# Altium PCB Copy of corePCB3.PcbDoc (part 2 of 3)
Units mil, origin at the board's own origin, x right, y up, seen from the top; angles counter-clockwise.
Board outline 6000 x 4000 mil, 6 copper layers (Top Layer, Layer 3, Layer 1, Layer 2, Layer 4, Bottom Layer), stack 32.111 mil thick; 90 components, 166 nets, 637 pads, 492 vias.
Unrouted connection lines stored in the file: 227.
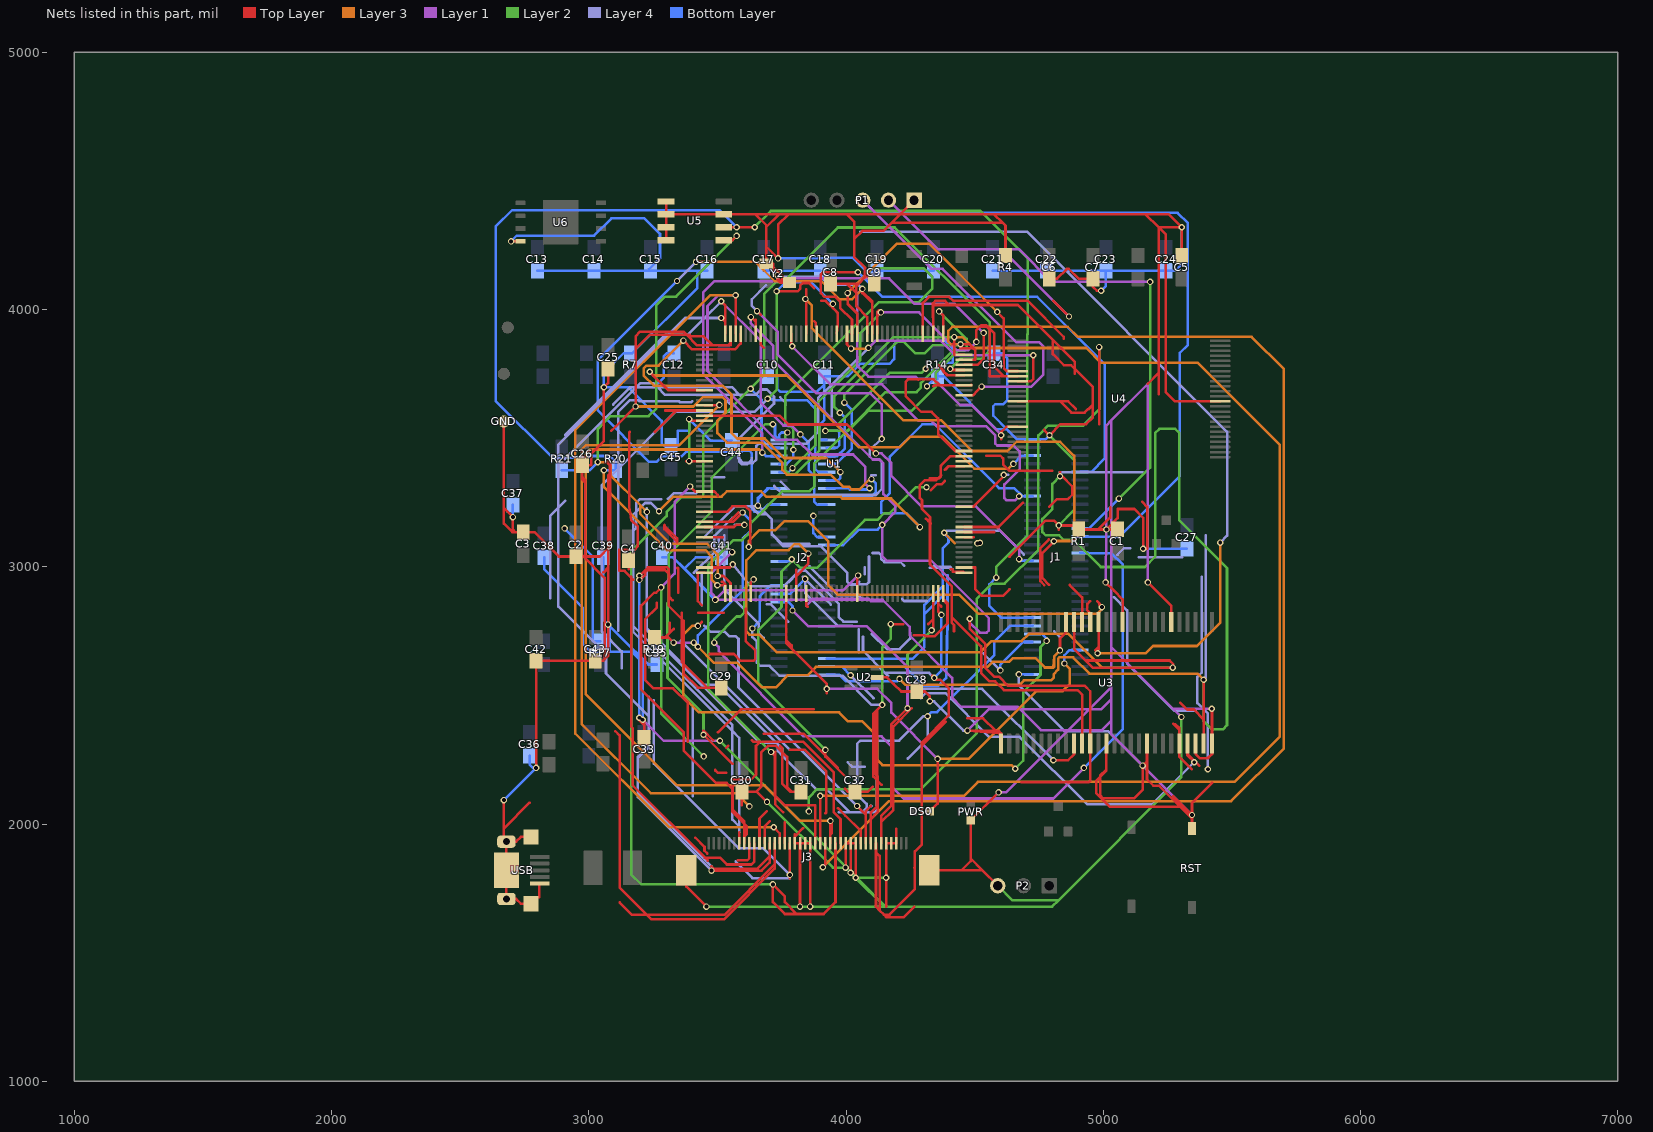
[diagram p6: the nets of this part, all layers, seen from the top]

## Via types
v1: diameter 25, hole 15, Top Layer to Bottom Layer, 492 vias

## Nets (pads, with @x,y where several pads share a name; then routed paths per layer and width w, separated by ;. In a path a pad name is that pad's centre, name@x,y a point inside that pad or via, vN(x,y) a via of type N, cw(c..) or ccw(c..) an arc to the next point about the centre after c; other vN are vias at no path point) (continued)
FMC_D13: J2.58 U1.96 U3.50 | length 2784.2
  Top Layer w10: U1.96@4459.09,3115.35 4496,3115.35 ; 5273,2389 5295.98,2366.02 ; 5279.98,2388.5 5295.98,2372.5 5295.98,2366.02 ; 5344,2213 5295.98,2261.02 U3.50@5295.98,2312.56 5295.98,2366.02
  Layer 3 w10: v1(4382,3132) 4423,3091
  Layer 4 w10: v1(4382,3132) 4383,3132 4391,3140 4599,3140 4691.5,3047.5 ; 5055.5,3047.5 5080,3072 5104,3072 ; 5139,3037 5307,3037 ; 5383,2961 5383,2589 5366,2572 5366,2470 5407,2429 v1(5407,2213)
  Bottom Layer w10: J2.58@3925.04,2643.03 J2.58@3953,2643.03 ; J2.58@3954.03,2642 4259,2642 4305,2688 4305,2816 ; J2.58@3953,2643.03 3954,2642.03 3954,2643.03 J2.58@3953,2643.03 ; 4305,2816 4305,2852 4376,2923 ; 4305,2816 4376,2887 4376,2923 ; 4376,2923 4376,3071.5 ; 4376,3071.5 4376,3072 4398,3094 4398,3112 4382,3128 v1(4382,3132) 4400,3114 4400,3095.5 4376,3071.5
  other v1: 4511,3091
FMC_D14: J2.59 U1.97 U3.51 | length 3286.9
  Top Layer w10: U1.97@4459.09,3135.04 4503,3135.04 4576,3135.04 ; U3.51@5327.48,2312.56 5327.48,2272 ; v1(5353.81,2240.19) 5327.48,2266.52 5327.48,2272 ; 5372.48,2227 5327.48,2272
  Layer 4 w10: v1(4018,2578) 4107,2489 ; 4290,2489 4310,2509 4386,2509 4556,2339 4675,2339 4938,2076 5189.63,2076 v1(5353.81,2240.19) ; 5041.5,2882 5093,2830.5 5093,2624 5277,2440 5360,2440
  Bottom Layer w10: J2.59@3925.04,2611.54 3984.46,2611.54 ; v1(4018,2578) 3984.46,2611.54 ; 4394.5,2966.5 4394.5,2789.5 4389.24,2567.24 4358,2536 4302.54,2536 4227,2611.54 3984.46,2611.54
  other v1: 4521,3093
FMC_D15: J2.60 U1.98 U3.53 | length 6146.8
  Top Layer w10: U1.98@4459.09,3154.72 4536.09,3154.72 4593.72,3154.72 4688,3249 ; 4790.5,3233.5 4820,3263 4862.5,3263 4879.5,3280 4879.5,3312 4839.5,3352 v1(4832,3352) ; 4831,3368 4832,3367 ; 5300,2471 5326,2445 5352.47,2445 5390.47,2407 ; v1(5390,2561) 5390.47,2560.53 5390.47,2407 ; U3.53@5390.47,2312.56 5390.47,2407
  Layer 2 w10: v1(4832,3352) 4802,3322 4802,3224.5 4763.5,3186 4763.5,3135 4776,3122.5 4828,3122.5 4845.5,3105 4885,3105 4991,2999 5162,2999 5202,3039 5202,3520 5218,3536 5280,3536 5296,3520 5296,3180 5481,2995 5481,2384 5465,2368 5422,2368 5390,2400 v1(5390,2561)
  Layer 3 w10: v1(4208,2564) 4230,2542 4676,2542 4692,2558 4797,2558 4807,2568 4807,2582 4825,2600 4825,2643 4830,2648 4883,2648 4946.5,2584.5 5366.5,2584.5 v1(5390,2561)
  Layer 4 w10: 4831,3368 5154,3368 ; 5399,2570 5399,3123
  Bottom Layer w10: J2.60@3925.04,2580.04 3974.39,2580.04 3999.93,2554.5 4198.5,2554.5 v1(4208,2564)
FMC_NBL0: J2.43 U1.169 U3.15 | length 4415.7
  Top Layer w10: v1(3654,3994) 3669.11,3978.89 ; U1.169@3669.11,3905.33 3669.11,3862.89 3680,3852 ; 4970,2676 4982,2688 ; v1(4978,2664) 4978,2676 4982,2680 4982,2688 ; U3.15@4981.02,2785 4981.02,2754 4982,2753.02 4982,2688
  Layer 1 w10: v1(3654,3994) 3735,3913 3735,3824 3885,3674 4096,3674 4139,3631 v1(4139,3497)
  Layer 3 w10: v1(4978,2664) 5166,2664 5194,2692 5364,2692 5455,2783 v1(5455,3094)
  Layer 4 w10: v1(3654,3994) 3634,4014 3634,4040 3689,4095 ; 4055,4303 4703,4303 5482,3524 5482,3121 v1(5455,3094) ; 4092.5,3428.55 4092.5,3456 v1(4139,3497)
  Bottom Layer w10: v1(3873,3197.5) 3873,3130.47 3888,3115.47 J2.43@3925.04,3115.47
FMC_NBL1: J2.44 U1.170 U3.39 | length 3480.7
  Top Layer w10: v1(3630,3970.5) 3649.43,3951.07 ; U1.170@3649.43,3905.33 3649.43,3951.07 ; 3649.43,3961 3649.43,3951.07 ; v1(4481,2798) 4481,2760 4542,2699 4542,2607 4576,2573 4594,2573 4630,2537 4928.53,2537 4949.53,2516 U3.39@4949.53,2312.56 4949.53,2168.53 4944,2163 4681,2163
  Layer 1 w10: v1(3630,3970.5) 3630,3946 3716.57,3859.43 3716.57,3804.49 4104,3417.05 4129.95,3417.05 4145.38,3401.62 4145.38,3282.62 4192,3236 4192,3214 v1(4141,3163) 4141,3040 4157,3024 4331.37,3024 4555,2800.37 4555,2752 4547,2744 4521,2744 4481,2784 v1(4481,2798)
  Bottom Layer w10: J2.44@3925.04,3083.98 3989.3,3083.98 4050.02,3144.69 4122.69,3144.69 v1(4141,3163)
FMC_NCE3: R17.2 U1.152 U4.9 | length 4372.5
  Top Layer w10: U1.152@4003.76,3905.33 4003.76,3864.24 v1(4020,3848) ; U4.9@4667.6,3721.53 4720,3721.53 4728,3729.53 v1(4728,3822)
  Layer 1 w10: v1(4087,3851) 4113.85,3877.85 4369.65,3877.85 4425.5,3822 v1(4728,3822)
  Layer 3 w10: v1(4020,3848) 4084,3848 v1(4087,3851)
  Layer 4 w10: 2906,3418.37 3185.63,3698 ; 3094.5,3630.5 3162,3698 3185.63,3698 ; 3585.13,3450.15 3585.13,3418.37 ; 3595,3659 3586,3668 ; 3633.5,3422.5 3633.5,3416 3621,3403.5 ; 3744,3659 3763.06,3639.94 3763.06,3628.08 ; 3945,3584 3945,3709 ; v1(4087,3851) 3945,3709 ; 3185.63,3698 3267,3698 ; 3185.63,3698 3201.13,3713.5 3251.5,3713.5 3267,3698 ; 3267,3698 3297,3668 3586,3668 ; 3267,3698 3556,3698 3586,3668 ; 3585.13,3418.37 3600,3403.5 3621,3403.5 ; 3585.13,3418.37 3582,3421.5 3582,3496 3720,3634 3720,3662 3693,3689 3669,3689 3648,3668 3586,3668 ; 3585.13,3418.37 3585.13,3408 3594.63,3398.5 3616,3398.5 3621,3403.5 ; 3621,3403.5 3637.5,3403.5 3651.5,3417.5 3651.5,3469.98 3659.96,3478.44 3846.44,3478.44 3891.74,3523.74 3891.74,3655.74 3945,3709
  Bottom Layer w10: v1(2906,3149) 3016,3039 3016,2710 R17.2@3045.06,2710
FMC_NE1: J1.35 U1.151 | length 2117.7
  Top Layer w10: U1.151@4023.44,3905.33 4023.44,3960.49 3977.22,4006.71 3977.22,4032 3959.72,4049.5 3934.43,4049.5 3916.52,4049.5 3902.46,4063.55 ; v1(4046,4145) 3911.18,4145 3902.46,4136.29 ; 3902.46,4063.55 3902.18,4063.84 3902.18,4136 3902.46,4136.29 ; 3902.46,4063.55 3902.46,4136.29
  Bottom Layer w10: v1(4046,4145) 4141.5,4049.5 4743.5,4049.5 5005.25,3787.75 5005.25,3420.27 4954,3369.02 J1.35@4910,3369.02
FMC_NOE: J2.26 U1.146 U4.8 | length 2015.2
  Top Layer w10: U1.146@4121.87,3905.33 4121.87,3975 ; v1@4127.87,3997 4121.87,3991 4121.87,3975 ; v1(4135.87,3989) 4121.87,3975 ; v1(4507,3874) 4507,3890 4507,3920 4520,3933 ; U4.8@4667.6,3741.22 4611.78,3741.22 ; 4520,3933 4526,3939 4544,3939 4577,3906 4577,3776 4611.78,3741.22 ; 4520,3933 4546,3933 4559,3920 4559,3741.22 4611.78,3741.22
  Layer 1 w10: v1(4135.87,3989) 4284,3989 4432,3841 4474,3841 v1(4507,3874)
  Layer 2 w10: v1(3792,3383.44) 3880.5,3471.94 3880.5,3628.42 4054.29,3802.22 4054.29,3907.42 v1(4135.87,3989)
  Bottom Layer w10: J2.26@3740,3367.44 3776,3367.44 v1(3792,3383.44)
FMC_NWAIT: J2.27 U1.150 U4.7 | length 2785.1
  Top Layer w10: v1(4006,4064) 4006,4023.13 ; U1.150@4043.13,3905.33 4043.13,3985 ; v1(4588,3991) 4613,3966 4613,3771.9 4624,3760.9 U4.7@4667.6,3760.9 ; 4006,4023.13 4006,4022.13 4043.13,3985 ; 4006,4023.13 4043.13,3986 4043.13,3985
  Layer 2 w10: v1(3795.5,3454.94) 3795.5,3536 3786,3545.5 3776,3545.5 3763.5,3558 3763.5,3664 4128,4028.5 4283.5,4028.5 4335,4080 4335,4128 4303,4160 4102,4160 v1(4006,4064)
  Layer 3 w10: v1(4006,4064) 4198,4256 4323,4256 v1(4588,3991)
  Bottom Layer w10: J2.27@3740,3398.94 3768.5,3398.94 3795.5,3425.94 v1(3795.5,3454.94)
FMC_NWE: J2.22 U1.147 U4.18 | length 4155.9
  Top Layer w10: v1(4064,4080) v1@4064,4069 ; U1.147@4102.19,3905.33 4102.19,4025.81 ; 4603,3495 v1(4603,3511) 4603,3523.37 4624,3544.37 U4.18@4667.6,3544.37 ; v1@4064,4069 4064,4064 4102.19,4025.81 ; v1@4064,4069 4102.19,4030.81 4102.19,4025.81
  Layer 1 w10: v1(4064,4080) 4043.5,4059.5 4043.5,3783.09 4087.09,3739.5 4270.5,3739.5 4279.5,3730.5 4341.58,3730.5 4443.08,3629 4488.5,3629 4603,3514.5 v1(4603,3511)
  Layer 3 w10: v1(3417,4185) 3648,4185 3723,4110 3904,4110 3974,4040 4024,4040 v1(4064,4080)
  Layer 4 w10: v1(3343,4111) v1(3417,4185) ; 3760,4128 3900,4128 3932,4096 4048,4096 v1(4064,4080)
  Bottom Layer w10: v1(3343,4111) 3035,3803 3035,3608 3235,3408 3263,3408 3284,3429 3361,3429 3380,3448 3594,3448 3597,3451 3624,3451 3634,3441 3634,3224 3644,3214 3669,3214 3696.46,3241.46 J2.22@3740,3241.46
FMC_SDCKE0: U1.35 U3.37 | length 1633.9
  Top Layer w10: U1.35@3450,3154.72 3549.28,3154.72 3564.72,3154.72 3573,3163 v1(3605,3163) ; v1(4806,2248) 4864,2248 4886.53,2270.53 U3.37@4886.53,2312.56
  Layer 4 w10: 3527,3122 3527,2912 3660,2779 3660,2743 3680,2723 ; 3568,3163 v1(3605,3163) ; 3691.95,2854.43 3707.12,2854.43 3774.55,2787 ; 4049.27,2667.73 4049.27,2757.23 ; 4279.85,2517 4287.85,2525 4529,2525 v1(4806,2248)
FMC_SDCLK: U1.112 U3.38 | length 1823.9
  Top Layer w10: 4310.51,3186.99 4320,3177.5 4320.28,3177.5 4326.5,3171.28 ; 4326.51,3344 4357.7,3344 ; 4329.78,3168 4326.5,3171.28 ; 4369.38,3355.67 4368.54,3354.84 ; 4419.87,2749.8 4419.87,2773.3 4410.5,2782.67 4410.5,2804.44 ; U1.112@4459.09,3430.32 4406.86,3430.32 4369.38,3392.83 4368.54,3392 4368.54,3354.84 ; U3.38@4918.03,2312.56 4918.03,2502.97 4905,2516 4900.5,2520.5 4613.5,2520.5 4579.81,2554.19 4557.66,2554.19 4524.99,2586.85 4524.99,2689.95 4410.5,2804.44 ; 4326.5,3171.28 4326.5,3193.5 4295.5,3224.5 4295.5,3259.08 4287.19,3267.39 4287.19,3317.69 4306.52,3337.02 4350.72,3337.02 4357.7,3344 ; 4326.5,3171.28 4326.5,3009 4329.78,3005.72 4410.5,2925 4410.5,2804.44 ; 4357.7,3344 4368.54,3354.84 ; 4357.7,3344 4362.37,3344 4368.54,3350.17 4368.54,3354.84
FMC_SDNCAS: U1.160 U3.17 | length 2528.9
  Top Layer w10: v1(3842,4041) v1@3846.28,4036.72 ; U1.160@3846.28,3905.33 v1@3846.28,4036.72 ; 3846.28,4079 v1@3846.28,4036.72 ; 4770.75,2928.75 4755.5,2944 4755.5,3072.5 4789,3106 ; 4789.5,2929.5 4763,2956 4763,3054 v1(4808,3099) ; 4869.5,2929.5 4918.03,2880.97 4918.03,2831.97 U3.17@4918.03,2785
  Layer 3 w10: v1(3842,4041) 3867,4016 3867,3926.5 4224,3569.5 4370.5,3569.5 4490,3450 4627,3450 4663,3486 4832,3486 4887,3431 4887,3104 4883.03,3100.03 4809.03,3100.03 v1(4808,3099)
FMC_SDNE0: R19.2 U1.34 U3.19 | length 2880.2
  Top Layer w10: R19.2@3255.06,2725 3296,2725 ; 3314,2783 3314,2743 3296,2725 ; v1(3330,2705) 3310,2725 3297,2725 ; 3330,2758 3297,2725 ; U1.34@3450,3174.41 3545.41,3174.41 ; 3582,3211 3545.41,3174.41 ; v1(3598,3211) 3561.41,3174.41 3545.41,3174.41 ; v1(4832,2674.92) 4832,2720.96 4855.04,2744 U3.19@4855.04,2785 ; 3296,2725 3297,2725
  Layer 1 w10: v1(3330,2705) v1(3408,2705)
  Layer 3 w10: v1(3408,2705) v1(3424,2689) 3486.5,2626.5 3578,2626.5 3673,2531.5 3728,2531.5 3775,2578.5 3851.5,2578.5 3883.5,2610.5 4550.5,2610.5 4571.5,2631.5 4635,2631.5 4648.5,2645 4736.4,2645 4772.9,2608.5 4806.5,2608.5 ; v1(4832,2674.92) 4809,2651.92 ; 4806.5,2608.5 4809,2651.92 ; 4806.5,2608.5 4809,2611 4809,2651.92
  Bottom Layer w10: v1(3424,2689) 3424,2733.5 3598.5,2908 3598.5,3109.5 3628.5,3139.5 3628.5,3180.5 v1(3598,3211)
FMC_SDNRAS: U1.59 U3.18 | length 3399.7
  Top Layer w10: U1.59@3806.91,2896.24 3806.91,2964.95 ; 3806.91,2988.91 3806.91,2964.95 ; v1@3854,3052 v1(3854,3051) 3854,3036 3854,3012.04 3806.91,2964.95 ; U3.18@4886.53,2785 4886.53,2680.47 4931.5,2635.5 ; v1(5270,2608) 4959,2608 4931.5,2635.5 ; 5273,2621 5258.5,2635.5 4931.5,2635.5
  Layer 3 w10: v1(3854,3051) 3817,3088 3800,3088 3776.5,3064.5 3651.59,3064.5 3612.41,3025.32 3612.41,2748.09 3624,2736.5 3662.5,2736.5 3731.5,2667.5 4521.75,2667.5 4565.25,2711 4682.59,2711 4710.55,2738.96 4864.54,2738.96 4995.5,2608 v1(5270,2608)
FMC_SDNWE: U1.32 U3.16 | length 2139.9
  Top Layer w10: U1.32@3450,3213.78 3537.78,3213.78 3558.5,3234.5 3595,3234.5 3610,3234.5 3628.5,3216 v1@3628.5,3084 ; 4949,2866.5 4938.5,2856 4938.5,2830.4 4949.53,2819.37 U3.16@4949.53,2785 ; 4976,2866.5 4985.5,2857 4985.5,2852.5 v1(4995,2843)
  Layer 3 w10: v1(3622,3077.5) 3622,3101 3662.5,3141.5 3724.5,3141.5 3759.38,3176.38 3853.62,3176.38 3930.5,3099.5 3930.5,2929 3968,2891.5 4440,2891.5 4514.5,2817 4976,2817 4995,2836 v1(4995,2843)
GBC_KEY: J1.15 U1.13 | length 1560.6
  Top Layer w10: U1.13@3450,3587.8 3687.5,3587.8 3741.2,3587.8 3776,3553 4004,3553 v1(4116,3441)
  Layer 1 w10: v1(4116,3441) 4138,3441 4176,3403 4176,3352 4293,3235 4505,3235 4673,3067 v1(4673,3030)
  Bottom Layer w10: v1(4673,3030) 4680.44,3022.56 J1.15@4724.96,3022.56
GBC_LED: J1.45 U1.50 | length 3657.2
  Top Layer w10: 3469.5,2661 3564,2661 3590.56,2634.44 3640.51,2634.44 3648,2641.93 3648,2673.93 3609.93,2712 3609.93,2837.17 ; U1.50@3629.74,2896.24 3629.74,2939.74 v1(3641,2951)
  Layer 1 w10: v1(3488,2705) 3504.67,2688.33 3504.67,2672 3835.67,2341 4138.46,2341 4175.46,2304 4175.46,2147.54 4224,2099 4806,2099 v1(4925,2218)
  Layer 2 w10: v1(3488,2705) 3488,2719.77 3575,2806.77 3589.77,2806.77 3605,2822 3605,2915 v1(3641,2951)
  Bottom Layer w10: J1.45@4910,3054.06 4940.59,3054.06 4941.38,3053.27 5030.73,3053.27 5076,3008 5076,2369 v1(4925,2218)
GND: C1.2 C2.1 C3.2 C4.1 C5.2 C6.1 C7.1 C8.1 C9.1 C10.1 C11.1 C12.2 C13.1 C14.1 C15.1 C16.1 C17.1 C18.1 C19.1 C20.1 C21.1 C22.1 C23.1 C24.1 C25.1 C26.1 C27.1 C28.1 C29.1 C30.1 C31.1 C32.1 C33.2 C34.2 C35.1 C36.1 C37.1 C38.1 C39.1 C40.1 C41.1 C42.1 C43.1 C44.2 C45.2 GND.1 J1.1 J1.30 J2.31 J3.3 J3.4 J3.5 J3.11 J3.12 J3.13 J3.20 J3.21 J3.22 J3.23 J3.29 J3.A J3.B P1.1 P2.3 PWR.2 R1.2 R4.2 R7.2 R14.1 RST.2 U1.14 U1.22 U1.37 U1.61 U1.71 U1.90 U1.102 U1.113 U1.126 U1.135 U1.148 U1.158 U2.2 U3.6 U3.12 U3.28 U3.41 U3.46 U3.52 U3.54 U4.13 U4.36 U5.1 U5.2 U5.3 U5.4 U5.7 U6.4 USB.5 USB.6 USB.7 USB.8 USB.9 Y2.2 Y2.4 | length 49889.1
  Top Layer w10: v1(2670,2092.94) 2670,1983 ; GND.1@2670,3565 2670,3228 ; USB.7@2679.65,1708.78 USB.7@2680,1708.78 ; v1(2698,4265) U6.4@2735,4265 ; 2770.06,2083.06 2670,1983 ; USB.9@2775,1950 2735.78,1950 2717,1931.22 USB.6@2680,1931.22 ; v1(2795.06,2218) C42.1@2795.06,2635 C43.1@3025.06,2635 3056,2635 3062,2641 ; USB.5@2809,1768.82 2807,1768.82 2807,1716 2775,1716 USB.8@2775,1690 2735.78,1690 2717,1708.78 USB.7@2680,1708.78 ; 3056.38,2978 3075,2996.62 ; 3059,2978 3075,2994 ; C25.1@3075,3770 3075,3723 3075,3714 v1(3059,3698) 3059,3489 3009,3439 3009,3395 C26.1@2975.06,3395 2975.06,3349.94 ; 3155.06,2990.94 C4.1@3155.06,3025 ; v1@3189,2410 3201.5,2397.5 3215,2384 ; v1(3197,2413) 3215,2395 3215,2384 ; v1@3197,2946 3218.84,2967.84 3218.84,2977 3229.34,2987.5 3296,2987.5 3311,2972.5 ; v1(3197,2965) 3229.75,2997.75 3305.25,2997.75 3311,2992 3311,2972.5 ; C33.2@3215,2335 3215,2384 ; U5.4@3300.59,4270 U5.3@3300.59,4320 U5.2@3300.59,4370 ; U5.1@3300.59,4420 U5.2@3300.59,4370 ; 3325.42,2869.59 3313,2882.02 3313,2970.5 3311,2972.5 ; 3361.5,2820.29 3361.5,2797.3 ; v1@3378.63,3410.63 v1(3390,3410.63) U1.22@3450,3410.63 ; J3.B@3379.35,1820.57 3379.35,1757 ; v1(3390,3574) 3395.89,3568.11 U1.14@3450,3568.11 ; U1.37@3450,3115.35 3498.65,3115.35 3520.14,3115.35 ; v1(3457,1679) 3379.35,1756.65 3379.35,1757 ; v1@3457.35,1679 3379.35,1757 ; 3502,2356 3591.5,2445.5 3874.57,2445.5 ; C29.1@3515,2530 3460.63,2530 ; 3534,2296 3541.5,2303.5 ; 3595.06,2072.4 C30.1@3595.06,2125 ; J3.29@3683.46,1925 3683.46,1984 3683.46,1990.44 3704,2010.98 ; v1(3693,2086) 3652.5,2126.5 ; v1(3733,4134) v1@3733,4124 ; 3744,2303.5 3752,2295.5 3752,2279.5 ; Y2.2@3780.55,4105 3752,4105 ; 3801.57,1960 3801.57,1952 ; v1(3821.26,1679) J3.22@3821.26,1925 ; C31.1@3825.06,2125 3790,2125 ; 3833.57,1984 3801.57,1952 ; U1.61@3846.28,2896.24 3846.28,2848.72 3851,2844 ; v1(3860.63,1679) J3.20@3860.63,1925 J3.21@3840.94,1925 J3.22@3821.26,1925 ; 3876,3955 3882,3949 3882,3936.65 3885.65,3933 U1.158@3885.65,3905.33 ; C8.1@3940.06,4100 4004,4100 ; 3995.57,2137.43 4008,2125 C32.1@4035.06,2125 4084,2125 4104.5,2145.5 ; v1(3998,1830) v1@3998.43,1830.43 ; v1@3998.43,1828.57 v1(3998.43,1830.2) v1@3998.43,1830.43 ; v1@4018.11,1808.89 v1(4018.11,1810.52) J3.12@4018.11,1925 ; v1@4037.8,1789.2 v1(4037.8,1791) J3.11@4037.8,1925 J3.12@4018.11,1925 ; U1.71@4043.13,2896.24 4043.13,2962.13 v1(4047,2966) ; U1.148@4082.5,3905.33 4082.5,3970.86 4040,4013.36 4040,4064 ; C9.1@4110.06,4100 4110.06,4103.5 4080.65,4132.91 ; U2.2@4120,2570 4160,2570 4185,2545 4215,2515 C28.1@4275,2515 4307,2515 4326,2496 v1(4326,2477) ; 4155.91,1679 v1(4155.91,1791) J3.5@4155.91,1925 J3.4@4175.59,1925 J3.3@4195.28,1925 4195.28,1981.23 ; P1.1@4265,4425 4210,4370 ; 4280.5,3728 4281,3728.5 ; U1.135@4338.41,3905.33 4338.41,3970.5 ; 4340.09,3702 4344,3705.91 4362.97,3705.91 ; U1.90@4459.09,2997.24 4503,2997.24 4503,2912 4528,2887 4610.5,2887 4635.5,2912 ; U1.102@4459.09,3233.46 4496,3233.46 4613,3350.46 v1(4613,3357) ; U1.113@4459.09,3450 4424,3450 4358.5,3515.5 4358.5,3576.5 4332.5,3602.5 4292.5,3602.5 4232.5,3662.5 4232.5,3720 4241,3728.5 4281,3728.5 ; 4472,2411 4533.13,2411 4581.13,2363 ; U1.126@4487,3708 4487,3705.91 U1.126@4459.09,3705.91 4362.97,3705.91 ; P2.3@4590,1760 4529,1821 ; v1(4593,2123) PWR.2@4485,2015 4485,1865 ; U3.28@4603.07,2312.56 U3.28@4603.07,2345.16 ; R4.2@4620.06,4210 4620.06,4325.94 4608,4338 ; 4635.5,3039.05 4775.95,3179.5 4808.5,3179.5 v1(4827,3161) ; U4.13@4667.6,3642.79 4720,3642.79 ; 4736.79,3642.79 4720,3642.79 ; 4770,3532 v1(4791,3511) 4834.17,3554.17 4933.17,3554.17 4960,3581 4960,3629 ; C6.1@4790.06,4120 4821,4120 4859,4158 4866,4158 4904,4120 C7.1@4960.06,4120 4960.06,4088 4975.06,4073 v1(4992,4073) ; 4827,3145 v1(4827,3161) ; 4888.87,3750.13 4888.87,3769.9 ; 4893.86,3613 4864.06,3642.79 4833.03,3642.79 ; 4944,3613 4960,3629 ; v1(5009.45,2939) 5041.45,2907 5075.51,2872.94 U3.12@5075.51,2785 ; U3.41@5012.52,2312.56 5012.52,2212.52 ; 5026.63,3232 5026.63,3191.63 4980,3145 ; C1.2@5055.06,3145 v1(5012,3145) ; 5152,3252 5171,3233 5171,3070 ; v1(5155,3070) 5155,3190.5 5120.82,3224.68 5056,3224.68 5056,3189 v1(5012,3145) ; U3.46@5170,2312.56 5170,2244 ; v1(5173.49,2939) 5205.49,2907 5264.49,2848 U3.6@5264.49,2785 ; 5173.49,3711.49 5215,3753 ; 5215,3670 5215,3753 ; 5273,2107 5313.5,2066.5 ; C5.2@5305.06,4210 v1@5305.06,4320 ; RST.2@5345,1982.09 5345,2021 ; U3.52@5358.98,2312.56 5358.98,2272 5374.98,2256 5405.97,2256 ; 5424,2161 5345,2082 v1(5345,2035) ; 5424,2270.97 5423.48,2271.48 ; U4.36@5455,3642.79 5279.41,3642.79 5242.21,3680 5242.21,4292.79 5215,4320 ; 2670,1983 2670,1931.22 USB.6@2679.65,1931.22 USB.6@2680,1931.22 ; 2670,3228 2670,3168 2703,3135 2714,3135 ; 2670,3228 v1(2705,3193) 2705,3144 2714,3135 ; USB.7@2680,1708.78 USB.9@2680,1820 USB.6@2680,1931.22 ; 2714,3135 C3.2@2745.06,3135 2789,3135 2884,3040 C2.1@2950.06,3040 2979,3040 ; 2975.06,3349.94 2975.06,3337.94 2987,3326 ; 2975.06,3349.94 2987,3338 2987,3326 ; 2979,3040 3062,2957 3062,2641 ; 2979,3040 3043,3040 3075,3072 ; 2979,3040 2987,3048 2987,3326 ; 3062,2641 3075,2654 v1(3075,2775) 3075,2994 ; 3075,2994 3075,2996.62 ; 3075,2996.62 3075,3072 ; 3075,3072 3082.65,3079.65 3082.65,3354.78 ; 3075,3072 3075,3347.13 ; 3075,3347.13 3075,3354.78 3082.65,3362.43 ; 3075,3347.13 3082.65,3354.78 ; 3075,3401.78 3075,3400.65 3082.65,3393 ; 3075,3401.78 3075,3409.43 3082.65,3401.78 3082.65,3394.13 ; 3075,3401.78 3082.65,3394.13 ; 3082.65,3354.78 3082.65,3362.43 ; 3082.65,3362.43 3082.65,3393 ; 3082.65,3393 3082.65,3394.13 ; U5.2@3300.59,4370 U5.7@3525,4370 3565,4370 3648,4370 ; 3311,2972.5 3311,2847.8 3361.5,2797.3 ; 3361.5,2797.3 3361.5,2629.13 3370,2620.63 ; 3361.5,2797.3 3370,2788.8 3370,2620.63 ; 3370,2620.63 3370,2584 3424,2530 3460.63,2530 ; 3370,2620.63 3460.63,2530 ; C30.1@3595.06,2125 3652.5,2126.5 ; C30.1@3595.06,2125 3651,2125 3652.5,2126.5 ; 3648,4370 3740,4370 ; 3648,4370 3690,4328 3690,4320 ; 3652.5,2126.5 3670,2144 3670,2277.5 3696,2303.5 3728,2303.5 3752,2279.5 ; 3690,4245 3690,4320 ; 3690,4245 Y2.4@3690,4177.83 3717.17,4177.83 3717.17,4165.83 ; 3690,4245 v1(3736,4199) 3736,4330 3776,4370 ; 3690,4320 3740,4370 ; 3717.17,4165.83 3717.17,4139.83 v1@3733,4124 ; 3717.17,4165.83 3733,4150 3752,4131 3752,4105 ; v1@3733,4124 3752,4105 ; v1@3733,4124 3733,4116 3744,4105 3752,4105 ; 3740,4370 3776,4370 ; 3752,2279.5 3752,2157.79 3784.79,2125 3790,2125 ; 3752,2279.5 3771,2260.5 3771,2144 3790,2125 ; 3776,4370 4004,4370 ; 3801.57,1952 J3.23@3801.57,1925 J3.22@3821.26,1925 ; v1@3998.43,1830.43 J3.13@3998.43,1925 J3.12@4018.11,1925 ; 4004,4100 4047.74,4100 ; 4004,4100 4040,4064 ; 4004,4370 4032,4342 4032,4274 ; 4004,4370 4210,4370 ; 4032,4274 4064,4306 4146,4306 4178,4338 ; 4032,4274 4032,4205 4074,4163 4074,4139.56 ; 4040,4064 4040,4092.26 4047.74,4100 ; 4047.74,4100 4074,4126.26 ; 4074,4126.26 4074,4139.56 ; 4074,4126.26 4080.65,4132.91 ; 4074,4139.56 4080.65,4132.91 ; 4178,4338 4210,4370 ; 4178,4338 4608,4338 ; 4210,4370 4576,4370 ; 4281,3728.5 4281.31,3728.81 4340.06,3728.81 4340.38,3728.5 ; 4281,3728.5 4340.38,3728.5 ; 4338.41,3970.5 4338.41,4016 4339.91,4017.5 4401.28,4017.5 ; 4338.41,3970.5 4338.28,3970.63 4338.28,4024 4347.78,4033.5 4385.28,4033.5 4401.28,4017.5 ; 4340.38,3728.5 4362.97,3705.91 ; 4401.28,4017.5 4668.48,4017.5 4804.03,3881.94 ; 4450,1821 4485,1856 4485,1865 ; 4450,1821 4449.57,1820.57 J3.A@4323.23,1820.57 4323.23,1821 4450,1821 ; 4450,1821 4529,1821 ; 4485,1865 4529,1821 ; 4576,4370 4608,4338 ; 4576,4370 5165,4370 ; 4581.13,2363 4587.04,2357.1 4591.13,2357.1 4595.6,2352.63 ; 4581.13,2363 4592.07,2363 4603.07,2352 ; 4581.13,2363 v1(4472,2363) 4595.6,2352.63 ; 4595.6,2352.63 4603.07,2352 ; 4595.6,2352.63 U3.28@4603.07,2345.16 ; U3.28@4603.07,2345.16 4603.07,2352 ; 4720,3642.79 4793.5,3642.79 4833.03,3642.79 ; 4804.03,3881.94 4888.87,3797.11 4888.87,3769.9 ; 4804.03,3881.94 4804.03,3826.51 4847.16,3783.38 4875.39,3783.38 4888.87,3769.9 ; v1(4827,3161) 4827.5,3160.5 4905.06,3160.5 R1.2@4905.06,3145 4980,3145 ; 4833.03,3642.79 4876.65,3599.17 4928,3599.17 4960,3631.17 ; 4888.87,3769.9 4960,3698.77 ; 4960,3629 4960,3631.17 ; 4960,3631.17 4960,3698.77 ; 4960,3631.17 4960,3679 4960,3698.77 ; 4980,3145 v1(5012,3145) ; 4988,2183 5012.52,2207.52 5012.52,2212.52 ; 4988,2183 4972.5,2167.5 4972.5,2120.5 5026.5,2066.5 5299.5,2066.5 ; 4988,2183 4988,2188 5012.52,2212.52 ; 4988,2183 4988,2112 5000,2100 5120,2100 5153,2133 v1(5153,2227) 5170,2244 ; 5165,4370 5215,4320 ; 5165,4370 5255.06,4370 v1@5305.06,4320 ; 5170,2244 5170,2173.69 5194.96,2148.73 5217.27,2148.73 5299.5,2066.5 ; 5215,3753 5215,4320 ; 5215,4320 v1(5305,4320) v1@5305.06,4320 ; 5299.5,2066.5 5306.5,2059.5 ; 5299.5,2066.5 5313.5,2066.5 ; 5306.5,2059.5 5345,2021 ; 5306.5,2059.5 5313.5,2066.5 ; 5313.5,2066.5 v1(5345,2035) ; 5345,2021 v1(5345,2035) ; 5405.97,2256 5408,2256 5423.48,2271.48 ; 5405.97,2256 5422.47,2272.5 ; 5422.47,2272.5 5423.48,2271.48 ; 5422.47,2272.5 5421.97,2273 U3.54@5421.97,2312.56 v1(5421.97,2448) 5424,2445.97 5424,2272 5423.48,2271.48
  Layer 1 w10: v1(3209.5,2405.5) 3291.5,2323.5 v1(3510,2323.5) ; v1(3491,2871) v1@3497,2877 ; v1(3493.5,2871.5) 3497,2871.5 3868,2871.5 ; v1(3557,3057) 3476.5,2976.5 3476.5,2897.5 v1@3497,2877 ; 3846.28,2848.72 3846.28,2849.78 3868,2871.5 ; v1(4047,2966) 3989,2908 3528,2908 v1@3497,2877 ; v1(4472,2363) 4554.5,2445.5 4677.5,2445.5 ; v1(4593,2123) 4622.54,2123 4864.54,2365 ; v1(5009.45,2939) v1(5012,3145) 5012,3550 5031,3569 ; v1(5173.49,2939) 5173.49,3711.49 5031,3569 ; v1(5304,2416) 5272,2448 ; v1(5345,2035) v1(5153,2227) 5031,2349 5031,2400 ; v1(5421.97,2448) 5272,2448 ; 3868,2871.5 3872.54,2876.04 4087.31,2876.04 4091.85,2871.5 ; 3868,2871.5 4091.85,2871.5 ; 4091.85,2871.5 4096.65,2866.7 4146.8,2866.7 ; 4091.85,2871.5 4142,2871.5 4146.8,2866.7 ; 4146.8,2866.7 4247.77,2765.73 4247.77,2733.05 4412.5,2568.32 4412.5,2491 4448,2455.5 4667.5,2455.5 4677.5,2445.5 ; 4677.5,2445.5 4758,2365 4864.54,2365 ; 4677.5,2445.5 4945.04,2445.5 ; 4864.54,2365 4945.04,2445.5 ; 4864.54,2365 4996,2365 5031,2400 ; 4945.04,2445.5 5031,2531.46 ; 4945.04,2445.5 4992,2445.5 5031,2484.5 ; 5031,2400 5031,2484.5 ; 5031,2484.5 5031,2531.46 ; 5031,2531.46 5031,2689 ; 5031,2689 5031,3569 ; 5031,2689 5272,2448
  Layer 2 w10: v1(3390,3410.63) v1(3390,3574) ; v1(3457,1679) v1(3821.26,1679) v1(3860.63,1679) 4149.63,1679 ; v1(3510,2323.5) 4000.75,1832.75 4000.86,1832.64 4020.55,1812.95 4040.15,1793.35 v1@4042.5,1791 ; v1(3693,2086) 3949,1830 v1(3998,1830) ; v1(3998.43,1830.2) v1(4018.11,1810.52) 4037.71,1790.92 4149.63,1679 ; v1(4037.8,1791) v1@4042.5,1791 ; v1(4155.91,1791) v1@4042.5,1791 ; P2.3@4590,1760 4646.53,1703.47 4825.47,1703.47 ; v1(4791,3511) 4886.5,3415.5 4886.5,3220.5 v1(4827,3161) ; v1(5304,2416) 5304,2182 4825.47,1703.47 ; v1@4042.5,1791 4154.5,1679 ; 4149.63,1679 4154.5,1679 ; 4154.5,1679 4801,1679 4825.47,1703.47
  Layer 4 w10: v1(4326,2477) 4342,2477 4456,2363 v1(4472,2363) ; v1(4613,3357) 4631,3357 ; v1(4672,2581.61) 4672,2538 4849,2361 5019,2361 v1(5153,2227)
  Bottom Layer w10: v1(2670,2092.94) v1(2795.06,2218) 2784,2218 2770.06,2231.94 C36.1@2770.06,2265 ; v1(2698,4265) 2720,4287 3020.59,4287 3088.09,4354.5 3216.5,4354.5 3277,4294 3277,4200 3233.53,4156.53 C15.1@3227,4150 ; v1(2705,3193) C37.1@2705,3240 ; C13.1@2800.06,4150 C14.1@3020.06,4150 C15.1@3227,4150 ; C38.1@2826.38,3036.93 2826.38,2990.62 2976,2841 2976,2701 3008,2669 3082,2669 ; C39.1@3056.38,3036.93 3056.38,2793.62 v1(3075,2775) v1@3082,2768 ; v1(3197,2413) 3197,2640 3168,2669 ; v1(3197,2965) v1(3197,2949) 3197,2655 ; v1(3209.5,2405.5) 3209.5,2413 3209.5,2640.5 3181,2669 ; C35.1@3265.06,2620 3232,2620 3197,2655 ; C40.1@3286.38,3036.93 3325.07,3036.93 ; C12.2@3331.07,3830.59 3304,3830.59 3291,3817.59 3291,3734 3255,3698 3152.5,3698 ; C16.1@3460.06,4150 3432,4150 ; v1(3491,2871) 3325.07,3036.93 ; v1@3497,2877 3497,2871.5 v1(3493.5,2871.5) 3492.5,2872.5 3372.23,2992.77 ; C41.1@3516.38,3036.93 3416.39,3036.93 3372.23,2992.77 ; C44.2@3555.06,3490 3474,3490 v1(3390,3574) 3390,3529.18 3345.18,3529.18 3345.18,3470 C45.2@3320.06,3470 3293.5,3470 3283.5,3480 3283.5,3567 3152.5,3698 ; C17.1@3680.06,4150 3717,4150 v1(3733,4134) 3749,4150 C18.1@3900.06,4150 ; C10.1@3696.07,3740.59 3732.5,3740.59 3732.5,3692 3744,3680.5 3888,3680.5 3916.07,3708.57 ; v1(3736,4199) 3936,4199 3938,4201 4027,4201 4078,4150 C19.1@4120.06,4150 C20.1@4340.06,4150 ; J2.31@3925.04,3493.43 3896.5,3493.43 3896.5,3551.5 3916.07,3571.07 3916.07,3708.57 ; v1(4315,3702) 4343,3730 4355.06,3730 R14.1@4355.06,3740 ; C21.1@4570.06,4150 C22.1@4780.06,4150 C23.1@5010.06,4150 ; C34.2@4575.06,3830 4608,3830 4627.5,3810.5 4627.5,3648 4612,3632.5 4581,3632.5 4572.5,3624 4572.5,3587.35 4625.35,3534.5 ; v1(4672,2581.61) J1.1@4724.96,2581.61 ; v1(4791,3511) 4775,3495 J1.30@4724.96,3495 4664.85,3495 4625.35,3534.5 ; v1(4992,4073) 5010.06,4091.06 C23.1@5010.06,4150 ; v1(5155,3070) C27.1@5324.94,3070 ; v1(5305,4320) 5305,4175 5280,4150 C24.1@5245.06,4150 C23.1@5010.06,4150 ; 3082,2669 3168,2669 ; 3082,2669 v1@3082,2768 ; v1@3082,2768 3181,2669 ; 3152.5,3698 v1(3059,3698) 3059,3753.59 3136,3830.59 R7.2@3161.07,3830.59 3169,3830.59 3422,4083.59 3422,4140 3432,4150 ; 3168,2669 3181,2669 ; 3181,2669 3183,2669 3197,2655 ; C15.1@3227,4150 C15.1@3240.06,4150 3432,4150 ; 3325.07,3036.93 3328.07,3036.93 3372.23,2992.77 ; 3916.07,3708.57 C11.1@3916.07,3740.59 4007,3740.59 4055.41,3789 4169,3789 4187.5,3807.5 4187.5,3864 4201.35,3877.85 4384.15,3877.85 4415,3847 4415,3793 4391,3793 4371,3773 4355.06,3773 R14.1@4355.06,3740 ; R14.1@4355.06,3740 4380.5,3740 4586,3534.5 4625.35,3534.5
IIC_SCL: J1.8 R20.1 U1.45 U5.6 | length 6002.3
  Top Layer w10: v1(3500,2928) U1.45@3531.32,2928 ; 3518,2942 3520,2942 3531.32,2930.68 U1.45@3531.32,2928 ; U5.6@3525,4320 v1(3575,4320) v1(3645,4320) ; U1.45@3531.32,2896.24 U1.45@3531.32,2928
  Layer 2 w10: v1(3645,4320) 3708,4383 4523,4383 4706,4200 4706,3905 4704,3903 4704,3118.85 4584,2998.85 v1(4584,2958)
  Layer 3 w10: v1(3059,3375) 3059,3310 3304,3065 3453,3065 3477.5,3040.5 3477.5,2950.5 v1(3500,2928)
  Bottom Layer w10: v1(3059,3375) R20.1@3105.06,3375 3105.06,3408 3089.06,3424 3065,3424 3058.5,3430.5 3002,3430.5 2995.5,3424 2859,3424 2638,3645 2638,4322 2702.5,4386.5 3508.5,4386.5 v1(3575,4320) ; v1(4584,2958) 4557,2931 4557,2848 4602.91,2802.09 J1.8@4724.96,2802.09
IIC_SDA: J1.7 R21.1 U1.46 U5.5 | length 6807.6
  Top Layer w10: 3294.54,3162.46 3294.54,3159.46 ; 3344,2995 3348,2991 3348,2900 ; 3344.5,2997 3348.15,2993.35 3348.15,2900.1 ; 3344.5,3096.04 3344,3096.54 ; 3426.5,2821.5 3524.5,2821.5 ; v1(3501,2964) 3523,2964 3551,2936 U1.46@3551,2896.24 ; U5.5@3525,4270 3559,4270 v1(3575,4286) ; 3294.54,3159.46 3344,3110 3344,3096.54 ; 3294.54,3159.46 3294.54,3146 3344,3096.54
  Layer 2 w10: v1(3035,3407) 3035,3536 3084.5,3585.5 3232.5,3585.5 3263,3616 3263,4017 3296,4050 3339,4050 v1(3575,4286)
  Layer 3 w10: v1(3035,3407) 3072,3407 3084.71,3394.29 3084.71,3354.88 3200.08,3239.52 ; v1(3226,3213.6) 3200.08,3239.52 ; v1(3501,2964) 3501,3048 3459,3090 3316,3090 3200.08,3205.92 3200.08,3239.52
  Layer 4 w10: 3226,3228 v1(3226,3213.6) 3226,2759.16 ; 3972,2046 4013,2046 ; 4006,2240 4023,2223 4043.5,2223 ; 4073,2223 4043.5,2223 ; 4120,2176 4120,2054 4112,2046 4064,2046 ; 4240.5,2254.5 4317,2331 v1(4317,2419) 4301,2419 4206,2324 4055.5,2324 4043.5,2312 4043.5,2223 ; 3226,2759.16 3226,2753 3663,2316 3728,2316 ; 3226,2759.16 3443.7,2541.46 3502.54,2541.46 3728,2316 ; 3728,2316 3735.09,2308.91 ; 3735.09,2308.91 3753,2291 3753,2265 ; 3735.09,2308.91 3735.09,2282.91 3753,2265 ; 3753,2265 3882.5,2135.5 3923.5,2135.5 4013,2046 ; 4013,2046 4064,2046 ; 4043.5,2223 4043.5,2114.5 4080,2078 4080,2062 4064,2046
  Bottom Layer w10: R21.1@2895.06,3375 3003,3375 v1(3035,3407) ; v1(4317,2419) 4333,2435 4354,2435 4576.5,2657.5 4576.5,2709.46 4637.63,2770.59 J1.7@4724.96,2770.59
JTCK: J1.42 P1.2 U1.137 | length 3446.7
  Top Layer w10: U1.137@4299.04,3905.33 4299.04,4000 4299.04,4026.26 4322.28,4049.5 4401.28,4049.5 4417.28,4033.5 4707,4033.5 4846.25,3894.25 4846.25,3886.75 ; 4806,4034 v1(4867,3973)
  Layer 1 w10: P1.2@4165,4425 4355,4235 4605,4235 ; v1(4867,3973) 4605,4235 ; v1(5181.95,4107.5) 4799.5,4107.5 4672,4235 4605,4235
  Layer 2 w10: v1(5061,3265) 5181.95,3385.95 v1(5181.95,4107.5)
  Bottom Layer w10: J1.42@4910,3148.54 4944.54,3148.54 v1(5061,3265)
JTMS: J1.43 P1.3 U1.124 | length 4171.9
  Top Layer w10: U1.124@4459.09,3666.54 4493.04,3666.54 4511,3684.5 v1(4527,3700.5)
  Layer 1 w10: P1.3@4065,4425 4331.59,4158.41 4375.72,4158.41 4662.14,3871.99 4752,3871.99 4767.5,3856.49 4767.5,3747.5 4720.5,3700.5 v1(4527,3700.5)
  Bottom Layer w10: P1.3@4065,4425 4114.5,4375.5 5289.5,4375.5 5329,4336 5329,3863 5298,3832 5298,3352 5063.05,3117.05 J1.43@4910,3117.05
KEY0: J1.6 U1.44 | length 3157.9
  Top Layer w10: v1(3424,2770) 3440,2786 ; 3440,2850 3424,2866 3424,2977.56 3440,2977.56 U1.44@3450,2977.56
  Layer 2 w10: v1(4658,2215) 4689.04,2246.04 4689.04,2512.84 4756,2579.81 4756,2688 v1(4780,2712)
  Layer 3 w10: v1(3424,2770) 3402,2770 3368,2736 3368,2494 3428,2434 3973,2434 4008,2399 4064,2399 4120.5,2342.5 4120.5,2249.93 4141.43,2229 4644,2229 v1(4658,2215)
  Layer 4 w10: 3440,2850 3440,2968 ; 3504.8,3032.8 3504.8,3113.8 ; 3858.18,3001.5 3969.45,2890.23 4046.27,2890.23 4061.5,2875 ; 4218,2875 4226,2867 4313,2867 ; 4809,2749 4831,2727
  Bottom Layer w10: J1.6@4724.96,2739.09 4761.91,2739.09 4780,2721 v1(4780,2712)
KEY1: J1.5 U1.43 | length 1317.1
  Top Layer w10: U1.43@3450,2997.24 3548.24,2997.24 v1(3560,3009)
  Layer 4 w10: v1(3560,3009) 3612.54,2943.49 3632,2924.02 3756.52,2924.02 3808.5,2976 ; 3776,2939 3808.5,2971.5 3808.5,2976 ; 4041.5,2786.5 3989.53,2786.5 3972.5,2803.53 3972.5,2855.5 3959,2869 3842.5,2985.5 3818,2985.5 3808.5,2976 ; 4100,2739.5 4160,2679.5 4208,2679.5 4249,2720.5 4249,2744 ; 4533.5,2663.5 v1(4600,2597)
  Bottom Layer w10: v1(4600,2597) 4600,2619.6 4688,2707.6 J1.5@4724.96,2707.6
KEY2: J1.28 U1.8 | length 2057.9
  Top Layer w10: v1(3237,3758) 3307.62,3687.38 ; U1.8@3450,3686.22 U1.8@3423.18,3686.22 ; 3307.62,3687.38 3308.78,3686.22 U1.8@3423.18,3686.22 ; 3307.62,3687.38 3423.18,3687.38 U1.8@3423.18,3686.22
  Layer 3 w10: v1(3237,3758) 3251.5,3743.5 3770.5,3743.5 4049.5,3464.5 4207.5,3464.5 4248,3505 4375,3505 4498.57,3381.43 4632.43,3381.43 v1(4651,3400)
  Bottom Layer w10: v1(4651,3400) 4683.01,3432.01 J1.28@4724.96,3432.01
LCD_B3: J2.35 J3.24 U1.154 | length 5971.5
  Top Layer w10: v1(3730,4071) 3813,4071 3822,4080 3822,4093 3832,4103 3856,4103 3876,4083 ; 3781.89,1789.5 v1(3781.89,1802.11) J3.24@3781.89,1925 ; 3904,4033.5 3921,4033.5 3964.39,3990.11 ; v1(3949,4022) 3949,4006 3968,3987 3968,3938.61 U1.154@3964.39,3905.33
  Layer 2 w10: v1(3695,3653) 3730,3688 v1(3730,4071)
  Layer 4 w10: 3115,2752 3115,3381 ; 3128,2605.37 3128,2671 3051,2748 3051,3317 3115,3381 ; 3253,2480.37 3253,2235 3582,1906 3678,1906 v1(3781.89,1802.11) ; 3402.5,3643.5 3398.22,3639.22 3355.5,3639.22 3351.22,3643.5 3196,3643.5 3193,3646.5 3158.5,3646.5 3115,3603 3115,3381 ; 3403.71,2107.93 3403.71,2463.29 ; 3538,3643.5 3547.5,3634 ; 3571.05,1854.12 3635.67,1789.5 3781.89,1789.5 ; v1(3695,3653) 3644,3602 3336,3602 3115,3381
  Bottom Layer w10: v1(3730,4071) 3766,4107 3864,4107 v1(3949,4022) ; J2.35@3925.04,3367.44 3892.5,3367.44 3880,3379.94 3880,3616 3848,3648 3716,3648 ; 3716,3648 v1(3695,3653) 3711,3653 3716,3648
LCD_B4: J2.36 J3.25 U1.173 | length 2399.9
  Top Layer w10: 3265,2859 3265,2842 3219,2796 3219,2560 3252,2527 3328,2527 3385,2470 3385,2319 ; v1(3368,3879) 3402,3845 3568,3845 3590.37,3867.37 U1.173@3590.37,3905.33 ; 3492.5,2211.5 3492.5,2208 3501.5,2199 3534,2199 ; J3.25@3762.2,1925 3762.2,2006
  Layer 3 w10: v1(3368,3879) 3271,3782 3224,3782 3213,3771 3213,3744 3253,3704 3520.39,3704 3555,3669.39 3555,3520 3576.5,3498.5 3684,3498.5 3759.56,3422.94 3923.06,3422.94 v1(3978,3368)
  Bottom Layer w10: J2.36@3925.04,3335.94 3968,3335.94 3978,3345.94 v1(3978,3368)
LCD_B5: J2.37 J3.26 U1.174 | length 4572
  Top Layer w10: U1.174@3570.69,3905.33 v1(3570.69,4055.63) ; v1(3719,1987.48) 3742.52,1963.96 J3.26@3742.52,1925
  Layer 1 w10: v1(3570.69,4055.63) 3503.76,4055.63 3461.5,4013.37 3461.5,3760.94 3728.8,3493.64 3809.86,3493.64 3867,3436.5 4027.5,3436.5 4075.5,3388.5 4075.5,3321 v1(4091.5,3305)
  Layer 3 w10: v1(3570.69,4055.63) 3472.38,4055.63 2947.5,3530.75 2947.5,2351.85 3311.87,1987.48 v1(3719,1987.48)
  Bottom Layer w10: J2.37@3925.04,3304.45 4011.08,3304.45 4015.15,3300.38 4086.88,3300.38 v1(4091.5,3305)
LCD_B6: J2.38 J3.27 U1.175 | length 5080.1
  Top Layer w10: 3087.06,3528.06 3103,3544 v1(3182,3623) 3182,3846 ; 3103,2361 3120,2344 3120,1753 3226,1647 ; 3120,1695 3168,1647 3226,1647 ; U1.175@3551,3905.33 3551,3870 ; J3.27@3722.83,1925 3722.83,1842.83 ; 3182,3846 3182,3896 3200,3914 3368,3914 3379.41,3902.59 ; 3182,3846 3238.59,3902.59 3379.41,3902.59 ; 3226,1647 3527,1647 3722.83,1842.83 ; 3226,1647 3244,1629 3524.83,1629 3722.83,1827 3722.83,1842.83 ; 3379.41,3902.59 3421,3861 3551,3861 3551,3870 ; 3379.41,3902.59 3391,3902.59 3397.59,3896 3446.85,3896 3481,3861.85 3542.86,3861.85 3551,3870
  Layer 3 w10: v1(3182,3623) 3407,3623 3443.5,3659.5 3520,3659.5 3531.5,3648 3531.5,3599.5 3500,3568 3500,3520 3537.5,3482.5 3673.5,3482.5 3752.5,3403.5 3752.5,3376 3770,3358.5 3940.5,3358.5 3987.5,3311.5 4011.08,3311.5 4022.2,3300.38 4051.71,3300.38 4092.34,3341 v1(4099,3341)
  Layer 4 w10: v1(3182,3623) 3292,3623 ; 3746.5,3330.5 3781.5,3295.5 ; 4099,3356.5 4115,3356.5
  Bottom Layer w10: J2.38@3925.04,3272.95 4099.32,3272.95 4115,3288.63 4115,3325 v1(4099,3341)
LCD_B7: J2.39 J3.28 U1.176 | length 6262.3
  Top Layer w10: v1(3477,1819) 3672.15,1819 3703.15,1850 3703.15,1873.12 ; 3477,1835 3485.5,1826.5 3656.53,1826.5 3703.15,1873.12 ; v1(3515,3967) 3531.32,3950.68 ; v1(3515,4032) 3531.32,4015.68 3531.32,3967 3531.32,3950.68 ; U1.176@3531.32,3905.33 3531.32,3950.68 ; J3.28@3703.15,1925 3703.15,1873.12
  Layer 1 w10: v1(3515,4032) 3667.86,3879.14 3667.86,3638 3756.6,3549.26 3787.62,3549.26 v1(3822.43,3514.45)
  Layer 4 w10: 2850,2876.93 2850,3198 2882,3230 ; 2908,3256 2882,3230 ; 2908,3511.44 3299.15,3902.59 3309.96,3902.59 ; 3233,2493.93 3233,2419.75 ; v1(3477,1819) 3191,2105 3191,2121 ; 3477,1835 3191,2121 ; v1(3515,3967) 3450,3967 ; v1(3515,4032) 3450,3967 ; 2882,3230 2882,3474.63 3309.96,3902.59 ; 2882,3230 2882,2845 3067,2660 3067,2585.75 3233,2419.75 ; 3191,2121 3191,2256 ; 3191,2256 3191,2261 3233,2303 ; 3191,2256 3233,2298 3233,2303 ; 3233,2303 3233,2419.75 ; 3309.96,3902.59 3385.59,3902.59 3450,3967 ; 3309.96,3902.59 3374.37,3967 3450,3967
  Bottom Layer w10: v1(3822.43,3514.45) 3855.53,3481.35 3855.53,3374.45 3876.5,3353.48 3876.5,3252.96 3888,3241.46 J2.39@3925.04,3241.46
LCD_BL: J1.23 J3.34 U1.163 | length 6411.5
  Top Layer w10: 3585,1968 3585.04,1967.96 J3.34@3585.04,1925 ; U1.163@3787.22,3905.33 3787.22,3860.78 v1(3791,3857)
  Layer 1 w10: v1(3791,3857) 3939,3709 4140,3709 4282,3567 4332,3567 4353,3546 4545.37,3546 4579.5,3511.87 4579.5,3480 4588,3471.5 4651.5,3471.5 4675,3448 4675,3379 4616,3320 4616,3266.5 4624,3258.5 4657.5,3258.5 v1(4673,3274)
  Layer 3 w10: v1(3273.17,3216) 3330,3272.83 3516.8,3272.83 3537.47,3293.5 3670,3293.5 3691.5,3272 3979.08,3272 3985.58,3265.5 4175.5,3265.5 v1(4287,3154)
  Layer 4 w10: v1(3273.17,3216) 3241.17,3248 3218.5,3248 3185,3214.5 ; 3282,3263 3200,3263 3185,3248 3185,3214.5 ; 3585,1968 3585,1990 3558,2017 3558,2362.18 ; 3585.04,1967.96 3585.04,2335.14 3558,2362.18 ; 3173,2770 3173,3138 ; 3173,2770 3173,2747.18 3558,2362.18 ; 3173,2770 3558,2385 3558,2362.18 ; 3173,3138 3173,3202.5 3185,3214.5 ; 3173,3138 3185,3150 3185,3214.5
  Bottom Layer w10: v1(4287,3154) 4232.5,3208.5 4136.5,3208.5 4136.5,3252.5 4170.5,3286.5 4170.5,3428 4296.5,3554 4346.07,3554 4594.07,3306 4654,3306 4685.47,3274.53 ; v1(4673,3274) 4673.53,3274.53 4685.47,3274.53 ; J1.23@4724.96,3274.53 4685.47,3274.53
LCD_CLK: J3.30 U1.111 | length 3347.4
  Top Layer w10: J3.30@3663.78,1925 3663.78,2021.09 3691.69,2049 ; 4545.57,3431.57 4600,3431.57 4610.67,3420.9 4610.67,3397.83 4636,3372.5 4802.5,3372.5 ; 4984,3554 v1(4984,3854)
  Layer 2 w10: v1(3856,2049) 3856,2103.5 3888,2135.5 4291,2135.5 4507.5,2352 4507.5,2874.5 4567.5,2934.5 4617,2934.5 4747.5,3065 4747.5,3510.5 4786,3549 4922,3549 4984,3611 v1(4984,3854)
LCD_DE: J3.33 U1.28 | length 2737.5
  Top Layer w10: v1@3281,2918 3262,2899 3254,2899 3203,2848 3203,2523.06 3369,2357.06 3369,2285.5 3494.81,2159.69 3536,2159.69 3557,2138.69 3557,2048 3604.72,2000.28 ; v1(3394,3312) 3413.48,3292.52 U1.28@3450,3292.52 3488.48,3292.52 3501,3280 3501,3274 ; 3559.06,2150.94 3559.06,2055.66 3604.72,2010 3604.72,2000.28 ; J3.33@3604.72,1925 3604.72,1952 ; 3604.72,1952 3604.72,2000.28 ; 3604.72,1952 3614.72,1962 3614.72,1990.28 3604.72,2000.28
  Layer 1 w10: v1(3281,2920) 3334,2973 3334,3252 v1(3394,3312)
  Layer 2 w10: v1(3281,2920) 3281,2429 v1(3447,2263)
LCD_G2: J2.30 J3.14 U1.128 | length 3915.8
  Top Layer w10: v1(3446,2347) 3559,2234 ; 3446,2363 3484,2325 ; 3559,2174 3632,2174 3650,2192 3650,2304 3665.5,2319.5 ; 3634.5,2325 3640,2319.5 3665.5,2319.5 ; 3804,2320 3666,2320 3665.5,2319.5 ; J3.14@3978.74,1925 3978.74,2019.26 3952,2046 3952,2202 3834.5,2319.5 3665.5,2319.5 ; 4358,3786 4379.89,3764.11 4379.89,3759.85 ; 4369.74,3770 4379.89,3759.85 ; U1.128@4459.09,3745.28 4394.46,3745.28 ; 4379.89,3759.85 4379.89,3757.39 4392,3745.28 4394.46,3745.28 ; 4379.89,3759.85 4394.46,3745.28
  Layer 2 w10: v1(3446,2347) 3446,2428 3306,2568 3306,2858 3311,2863 3311,3046.81 3478,3213.81 3478,3346 3686,3554 v1(3716,3554) ; v1(3772,3522) 3763.5,3522 3763.5,3376 3779.56,3359.94 3803.88,3359.94 3896.5,3452.56 3896.5,3551.5 3967,3551.5 4170.5,3755 4295,3755 v1(4310,3770)
  Bottom Layer w10: v1(3716,3554) 3724,3554 3724,3509.43 J2.30@3740,3493.43 3740,3512 3750,3522 v1(3772,3522)
LCD_G3: J2.29 J3.15 U1.129 | length 5674.7
  Top Layer w10: J3.15@3959.06,1925 3959.06,1696 3913.06,1650 3808,1650 ; v1(4405,3769) 4409.04,3764.96 U1.129@4459.09,3764.96 ; 3808,1650 3762,1650 3716,1696 v1(3716,1765) 3762,1719 3762,1696 3808,1650
  Layer 2 w10: v1(3629,3692) 3682,3745 3682,3746 ; v1(3716,1765) 3204,1765 3165,1804 3165,3059 3302.5,3196.5 3302.5,3213 3360,3270.5 3438,3270.5 3445.5,3278 3445.5,3509.5 3682,3746 ; v1(4405,3769) 4444,3808 4527,3808 4559,3840 4559,3949 4189,4319 3968,4319 3754.39,4105.39 3726.39,4105.39 3682,4061 3682,3746
  Bottom Layer w10: v1(3629,3692) 3671.5,3649.5 3671.5,3494.43 3704,3461.93 J2.29@3740,3461.93
LCD_G4: J2.28 J3.16 U1.130 | length 5106.3
  Top Layer w10: J3.16@3939.37,1925 3939.37,1959.37 ; v1(3939.37,2012) 3939.37,1959.37 ; v1@3945,2012 3945,1965 3939.37,1959.37 ; U1.130@4459.09,3784.65 4512,3784.65 4535,3807.65 v1(4535,3909)
  Layer 1 w10: v1(3675,3444) 3675,3518 3445.5,3747.5 3445.5,4067.5 3488.5,4110.5 3756.5,4110.5 3767,4121 4168,4121 4267.03,4021.97 4422.03,4021.97 v1(4535,3909)
  Layer 3 w10: v1(3675,3444) 3663.18,3455.82 3004,3455.82 2988,3439.82 2988,2505 3343,2150 3684,2150 3822,2012 v1(3939.37,2012)
  Bottom Layer w10: v1(3675,3444) 3688.57,3430.43 J2.28@3740,3430.43
LCD_G5: J2.34 J3.17 U1.131 | length 7845.2
  Top Layer w10: 3781,2289 3839,2289 3924,2204 3924,2045.31 3919.69,2041 ; v1(3910,1832) 3919.69,1841.69 J3.17@3919.69,1925 ; 4445,3849 4494,3849 4503,3840 ; v1(4445,3865) 4480,3865 4503,3842 4503,3840 ; U1.131@4459.09,3804.33 4503,3804.33 4503,3840
  Layer 2 w10: v1(3994.01,3638.01) 3994.01,3670.51 4198,3874.5 4225,3874.5 4269,3830.5 4306.67,3830.5 4337.1,3860.93 4440.93,3860.93 v1(4445,3865)
  Layer 3 w10: v1(3910,1832) 4167,2089 5497,2089 5702,2294 5702,3769 5577,3894 4901,3894 4862,3933 4413.5,3933 4397.5,3917 4397.5,3875.5 4408,3865 v1(4445,3865)
  Layer 4 w10: 3308,3264 3330.5,3286.5 3417.5,3286.5 ; 3357.78,2712.22 3781,2289 ; 3478.5,3347.5 3527,3347.5 ; 3721,3314.5 3756.5,3279 4116,3279 4139,3302 4139,3408 4130.72,3416.28 4105.72,3416.28
  Bottom Layer w10: J2.34@3925.04,3398.94 3960.94,3398.94 4022.55,3460.55 4022.55,3609.46 v1(3994.01,3638.01)
LCD_G6: J2.33 J3.18 U1.132 | length 5630.1
  Top Layer w10: J3.18@3900,1925 3900,2080 v1(3900,2109) ; 4416,3866 4421,3861 ; 4421,3873 4421,3861 ; v1(4421,3893) 4421,3861 ; U1.132@4459.09,3824.02 4421,3824.02 4421,3861
  Layer 2 w10: v1(3976,3599) 3954.51,3620.49 3954.51,3663.72 4183.79,3893 v1(4421,3893)
  Layer 3 w10: v1(3900,2109) 4458,2109 4513,2164 5511,2164 5686,2339 5686,3475 5368,3793 4992,3793 4934.5,3850.5 4496,3850.5 4453.5,3893 v1(4421,3893)
  Bottom Layer w10: J2.33@3925.04,3430.43 3965.43,3430.43 3995.5,3460.5 3995.5,3579.5 v1(3976,3599)
LCD_G7: J2.32 J3.19 U1.133 | length 4147
  Top Layer w10: v1(3709,2280) 3723.83,2265.17 3723.83,2112 3725,2110.83 ; 3725,2280 3725,2110.83 ; 3756,2045 3725,2076 3725,2110.83 ; J3.19@3880.32,1925 3880.32,2004.68 3880.32,2071.68 3879.5,2072.5 3763.33,2072.5 3725,2110.83 ; v1@4361.78,3994 4377.78,3978 4377.78,3977.22 ; v1(4362,3993) 4377.78,3977.22 ; U1.133@4377.78,3905.33 4377.78,3977.22
  Layer 2 w10: v1(3709,2280) 3464,2525 3464,3004.49 3562.82,3103.31 3595.81,3103.31 3628.5,3136 3628.5,3168.99 3753.51,3294 3859,3294 3877,3312 3877,3401.88 4003.12,3528 ; v1(3920,3528) 4003.12,3528 ; v1(4362,3993) 4469,3886 4469,3848 4461,3840 4435.41,3840 ; 4003.12,3528 4007.85,3528 4085.85,3606 4254.56,3606 4348.26,3699.69 4348.26,3752.84 4435.41,3840 ; 4003.12,3528 4154.12,3679 4274.06,3679 4291.06,3696 4291.06,3714.44 4416.62,3840 4435.41,3840
  Bottom Layer w10: v1(3920,3528) 3968,3528 3973.75,3522.25 3973.75,3472 3963.68,3461.93 J2.32@3925.04,3461.93
LCD_HSYNC: J3.31 U1.12 | length 2751.7
  Top Layer w10: 3158,3230 3158,3233 ; 3158,3522 3158,3233 ; 3159.5,3524 3158,3522.5 3158,3233 ; 3165,2962 3165,2958 ; 3173,2950 3165,2958 ; 3257,3524 3340.48,3607.48 ; 3298,3607.48 3340.48,3607.48 ; U1.12@3450,3607.48 3340.48,3607.48 ; 3463,1858 3452,1869 ; J3.31@3644.09,1925 3644.09,1886.09 3644.09,1854.59 3632,1842.5 3537.12,1842.5 3510.62,1869 3452,1869 ; 3158,3233 3165,3182.06 3191.06,3156 3191.06,3080 3177.06,3066 3119.06,3066 3119.06,2984 3139,2984 3165,2958 ; 3165,2958 3165,2379 3171,2373 3171,2150 3173,2148 3452,1869
LCD_R3: J2.10 J3.6 U1.86 | length 2348.1
  Top Layer w10: J3.6@4136.22,1925 4136.22,2007 ; v1(4239,2450) 4175.46,2386.46 4175.46,2070.24 4136.22,2031 4136.22,2007 ; 4255,2450 4184.5,2379.5 4184.5,2055.28 4136.22,2007 ; 4320,2777.5 4338.41,2795.91 ; v1(4333,2753) 4338.41,2758.41 4338.41,2795.91 ; U1.86@4338.41,2896.24 4338.41,2795.91
  Layer 1 w10: v1(3792,2830) 3852.5,2769.5 4080.5,2769.5 4239,2611 v1(4239,2450)
  Layer 2 w10: v1(4239,2450) 4239,2659 v1(4333,2753)
  Bottom Layer w10: J2.10@3740,2863.5 3776,2863.5 3792,2847.5 v1(3792,2830)
LCD_R4: J2.11 J3.7 U1.87 | length 3200.4
  Top Layer w10: J3.7@4116.54,1925 4116.54,1890 ; 4265,1678 4224,1637 4158,1637 4147,1648 ; 4265,1829.84 4267.45,1832.29 ; v1@4335,2576 v1(4343,2568) 4351,2560 4367,2560 4399,2528 4399,2421 4295,2317 4295,2304.88 ; U1.87@4358.09,2896.24 4358.09,2857.91 ; v1(4371,2813) 4358.09,2825.91 4358.09,2857.91 ; 4371,2845 4358.09,2857.91 ; 4387.11,2396.99 4295,2304.88 ; 4116.54,1890 4116.54,1678.46 4131,1664 ; 4116.54,1890 4131,1875.54 4131,1664 ; 4131,1664 4147,1648 ; 4147,1648 4169,1648 4267.45,1746.45 4267.45,1832.29 ; 4267.45,1832.29 4267.45,1893.45 4295,1921 4295,2304.88
  Layer 4 w10: 3832,2962 v1(3841,2953) ; 3941,2853 v1(3841,2953) ; 4023.5,2770.5 3968,2770.5 3841,2897.5 v1(3841,2953) ; 4066,2728 4066,2674 4152.5,2587.5 ; 4164,2576 4152.5,2587.5 ; v1(4343,2568) 4323.5,2587.5 4152.5,2587.5
  Bottom Layer w10: J2.11@3740,2895 3783,2895 v1(3841,2953) ; v1(4343,2568) 4371,2596 v1(4371,2813)
LCD_R5: J2.12 J3.8 U1.88 | length 2939.7
  Top Layer w10: J3.8@4096.85,1925 4096.85,1996.41 4096.85,2019.85 4096.85,2020 ; 4138.83,2152.17 4123,2168 ; v1@4140.5,2463 4106.5,2429 4106.5,2184.5 4120.5,2170.5 ; v1(4141,2463) 4120.5,2442.5 ; v1(4174,2777) 4221.5,2777 ; 4264.2,2734.3 4304.7,2734.3 4309.5,2729.5 4344,2729.5 4394.5,2780 4394.5,2821.5 4394.5,2852.28 ; U1.88@4377.78,2896.24 U1.88@4377.78,2869 ; 4096.85,2020 4096.85,2045.24 4120.5,2068.89 4120.5,2170.5 ; 4096.85,2020 4123,2046.15 4123,2168 ; 4120.5,2170.5 4120.5,2187.5 ; 4120.5,2170.5 4123,2168 ; 4120.5,2187.5 4120.5,2442.5 ; 4120.5,2187.5 4123,2185 4123,2168 ; 4120.5,2187.5 4112,2196 4112,2434 4120.5,2442.5 ; U1.88@4377.78,2869 U1.88@4378.02,2868.76 ; U1.88@4377.78,2869 4377.78,2868.76 U1.88@4378.02,2868.76 ; U1.88@4378.02,2868.76 4394.5,2852.28 ; U1.88@4378.02,2868.76 4384,2868.76 4394.5,2858.26 4394.5,2852.28
  Layer 2 w10: v1(4141,2463) 4141,2687 4174,2720 v1(4174,2777)
  Layer 4 w10: v1(3636,2760) 3636,2727 3653.5,2709.5 3653.5,2627.5 3666.5,2614.5 3702.5,2614.5 3740.5,2576.5 3985.93,2576.5 4099.43,2463 v1(4141,2463)
  Bottom Layer w10: v1(3636,2760) 3664.5,2788.5 3664.5,2885 3706,2926.5 J2.12@3740,2926.5
LCD_R6: J2.24 J3.9 U1.89 | length 3365.9
  Top Layer w10: v1(4043,2070) 4077.17,2035.83 ; J3.9@4077.17,1925 4077.17,2035.83 ; 4096.17,2070 4077.17,2051 4077.17,2035.83 ; 4408,2990 4415,2990 4415,2981 4455.65,2981 U1.89@4459.09,2977.56
  Layer 4 w10: 3409,2977 3488,3056 3488,3120 3558.5,3190.5 ; 3449,2771 3473,2747 3529,2747 3545.37,2730.63 3571.15,2730.63 3582,2719.78 3582,2531 v1(4043,2070) ; 3449,3115 3568.5,3234.5 ; 3558.5,3225 3568,3234.5 3568.5,3234.5 ; v1(3657.5,3238) v1@3657.75,3237.75 ; v1(3658,3238) v1@3657.75,3237.75 ; 3858,3088.5 3750.5,3088.5 3711.5,3127.5 ; 4016,2930.5 4040,2930.5 4040.91,2931.41 ; 4051.5,2942 4040.91,2931.41 ; 4073.48,2971.48 4073.48,2998.48 ; 4089.5,3040 4089.5,2940.5 4080.4,2931.41 4040.91,2931.41 ; 4096.17,2070 4099,2070 ; 4103,3053.5 4128,3053.5 4136.5,3045 4136.5,3030.5 4149.5,3017.5 4152.5,3017.5 ; 4146,3024 4152.5,3017.5 ; 4153,3017 4152.5,3017.5 ; 4225.76,3004.52 4212.78,3017.5 4152.5,3017.5 ; 4325.69,2995.69 4402.31,2995.69 4408,2990 ; 4341.48,3004.52 4345.5,3000.5 4404.5,3000.5 4415,2990 ; 3568.5,3234.5 3631.5,3234.5 ; 3631.5,3234.5 3654.5,3234.5 v1@3657.75,3237.75 ; 3631.5,3234.5 3644,3222 3644,3221 3660.5,3204.5 3691,3204.5 ; v1@3657.75,3237.75 3691,3204.5 ; 3691,3204.5 3711.5,3184 3711.5,3127.5 ; 3711.5,3127.5 3711.5,3124.66 3755.66,3080.5 3900.96,3080.5 4005.5,2975.96 4005.5,2941 4015.09,2931.41 4040.91,2931.41
  Bottom Layer w10: v1(3657.5,3238) 3657.5,3267.5 3694.45,3304.45 3698.45,3304.45 ; v1(3658,3238) 3658,3264 3698.45,3304.45 ; J2.24@3740,3304.45 3698.45,3304.45
LCD_R7: J2.15 J3.10 U1.110 | length 2449.3
  Top Layer w10: 3681,2351 3835,2351 3920,2266 ; v1(3920,2288) 3920,2266 ; 3968,2062 3997.14,2032.86 4057.48,1972.52 J3.10@4057.48,1925 ; 3968,2218 3920,2266 ; 3997.14,2184.86 3920,2262 3920,2266 ; 4330,3298 4352,3320 4370.54,3320 4384.54,3334 ; 4384.54,3377.49 4398,3390.95 4400,3390.95 ; 4389,3379.95 4400,3390.95 ; U1.110@4459.09,3390.95 4400,3390.95
  Layer 2 w10: v1(3789,3029) v1@3793.01,3024.99 ; v1(3920,2288) 3659.5,2548.5 3659.5,2754.5 3749.15,2844.15 3749.15,2981.13 v1@3793.01,3024.99 ; v1(4313,3309) 4270.5,3309 4169.5,3208 4148,3208 4122,3182 4074,3182 3887.5,2995.5 3822.5,2995.5 v1@3793.01,3024.99
  Bottom Layer w10: J2.15@3740,3020.98 v1@3780.98,3020.98 ; v1(3789,3029) v1@3780.98,3020.98 ; v1@3793.01,3024.99 3790.6,3024.19 v1@3780.98,3020.98
LCD_VSYNC: J3.32 U1.11 | length 2715.9
  Top Layer w10: 3414,1947 3450,1911 3450,1896 3460.76,1885.24 ; U1.11@3450,3627.17 v1@3500.83,3627.17 ; v1@3508,3620 v1@3500.83,3627.17 ; v1(3508,3629) 3506.17,3627.17 v1@3500.83,3627.17 ; 3579.86,1858.5 3616,1858.5 3624.41,1866.91 J3.32@3624.41,1925
  Layer 3 w10: v1(3508,3629) 3351,3472 2988,3472 2972,3456 2972,2389 3241,2120 3573,2120 v1(3624.41,2068.59)
LED0: DS0.2 J1.57 U1.57 | length 2100.9
  Top Layer w10: U1.57@3767.54,2896.24 3767.54,2715.96 ; 3925,2509 v1(3925,2525) 3925,2545.87 3788.87,2682 ; DS0.2@4326.93,2050 4356,2079.07 v1(4356,2253) ; 3767.54,2715.96 3767.54,2703.33 3788.87,2682 ; 3767.54,2715.96 3788.87,2694.63 3788.87,2682
  Layer 1 w10: v1(3925,2525) 4121.5,2525 4176.13,2470.37 4176.13,2432.87 v1(4356,2253)
  Layer 3 w10: v1(4356,2253) 4476.27,2253 4739.77,2516.5 4842.5,2516.5 4870.5,2544.5 4870.5,2602.5 v1(4849,2624)
  Bottom Layer w10: v1(4849,2624) 4849,2656 4869.1,2676.1 J1.57@4910,2676.1